# EAGLE board Backplane (EAGLE 6.6.0), part 1 of 2
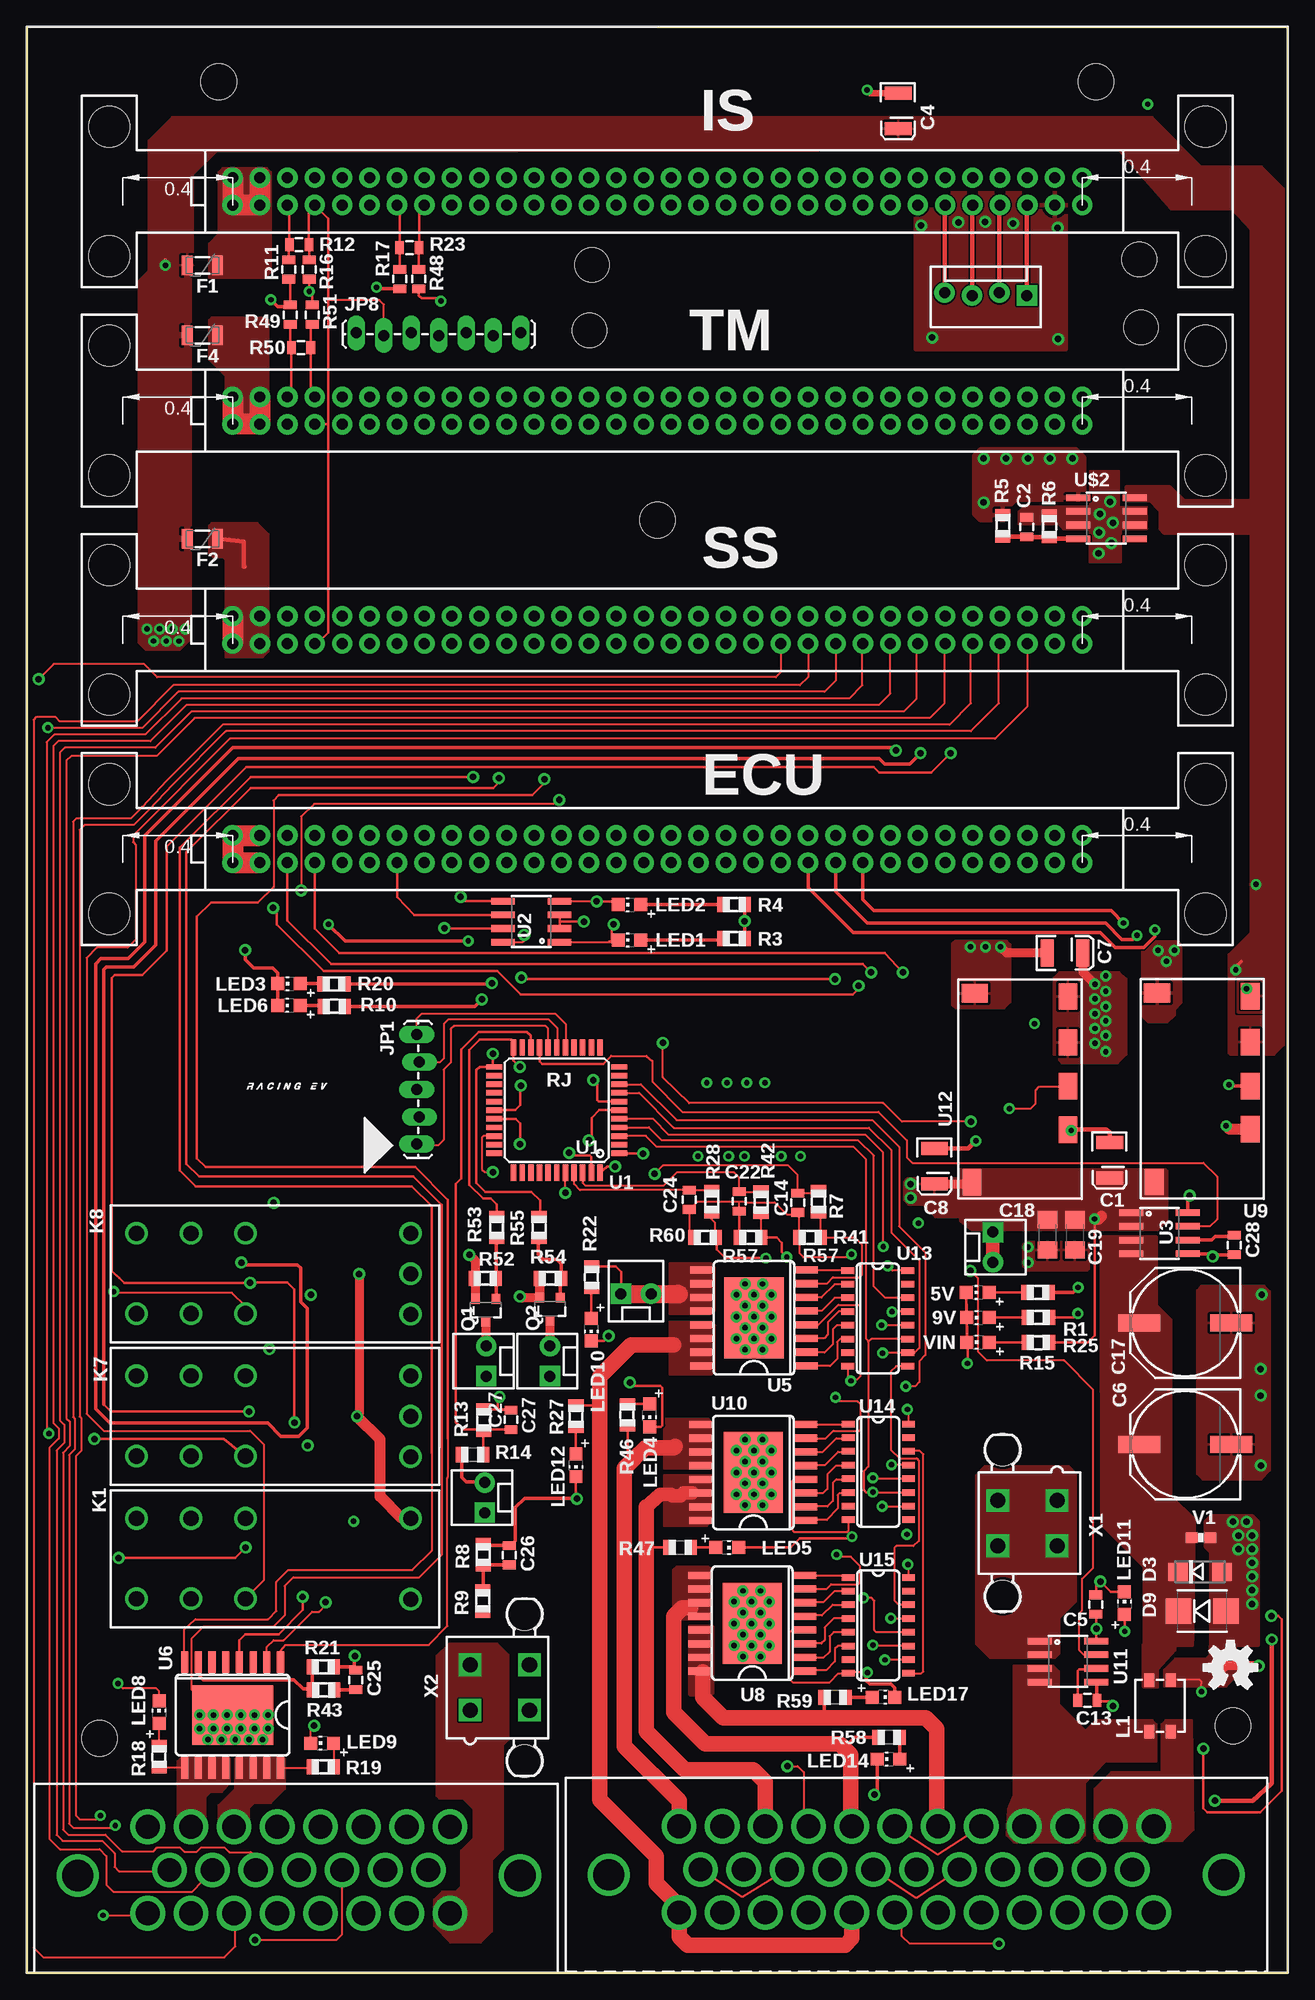
[diagram p0: board, top side]
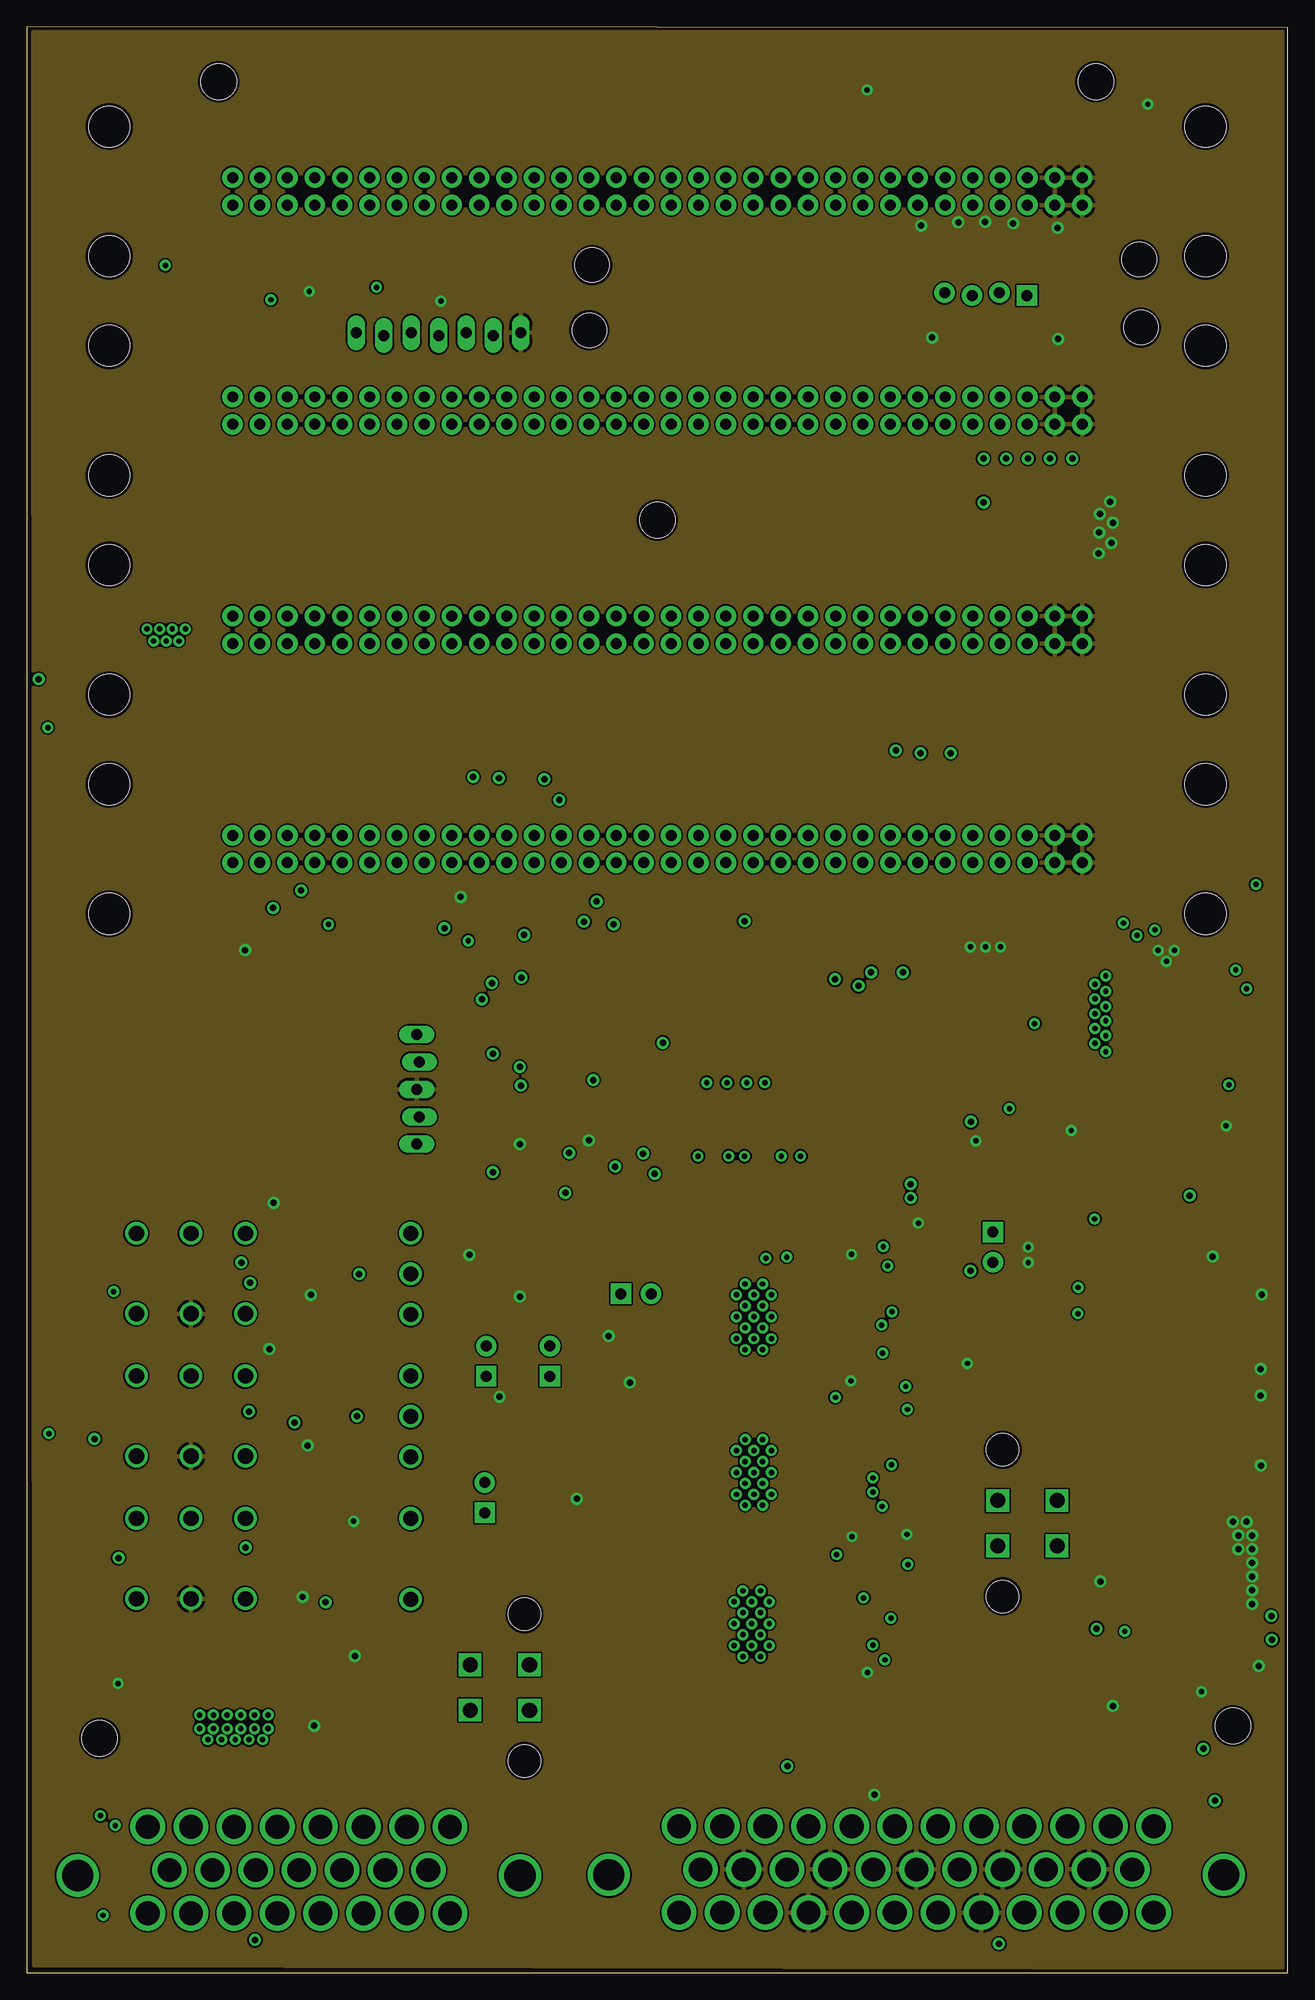
[diagram p1: board, inner layer Route2]
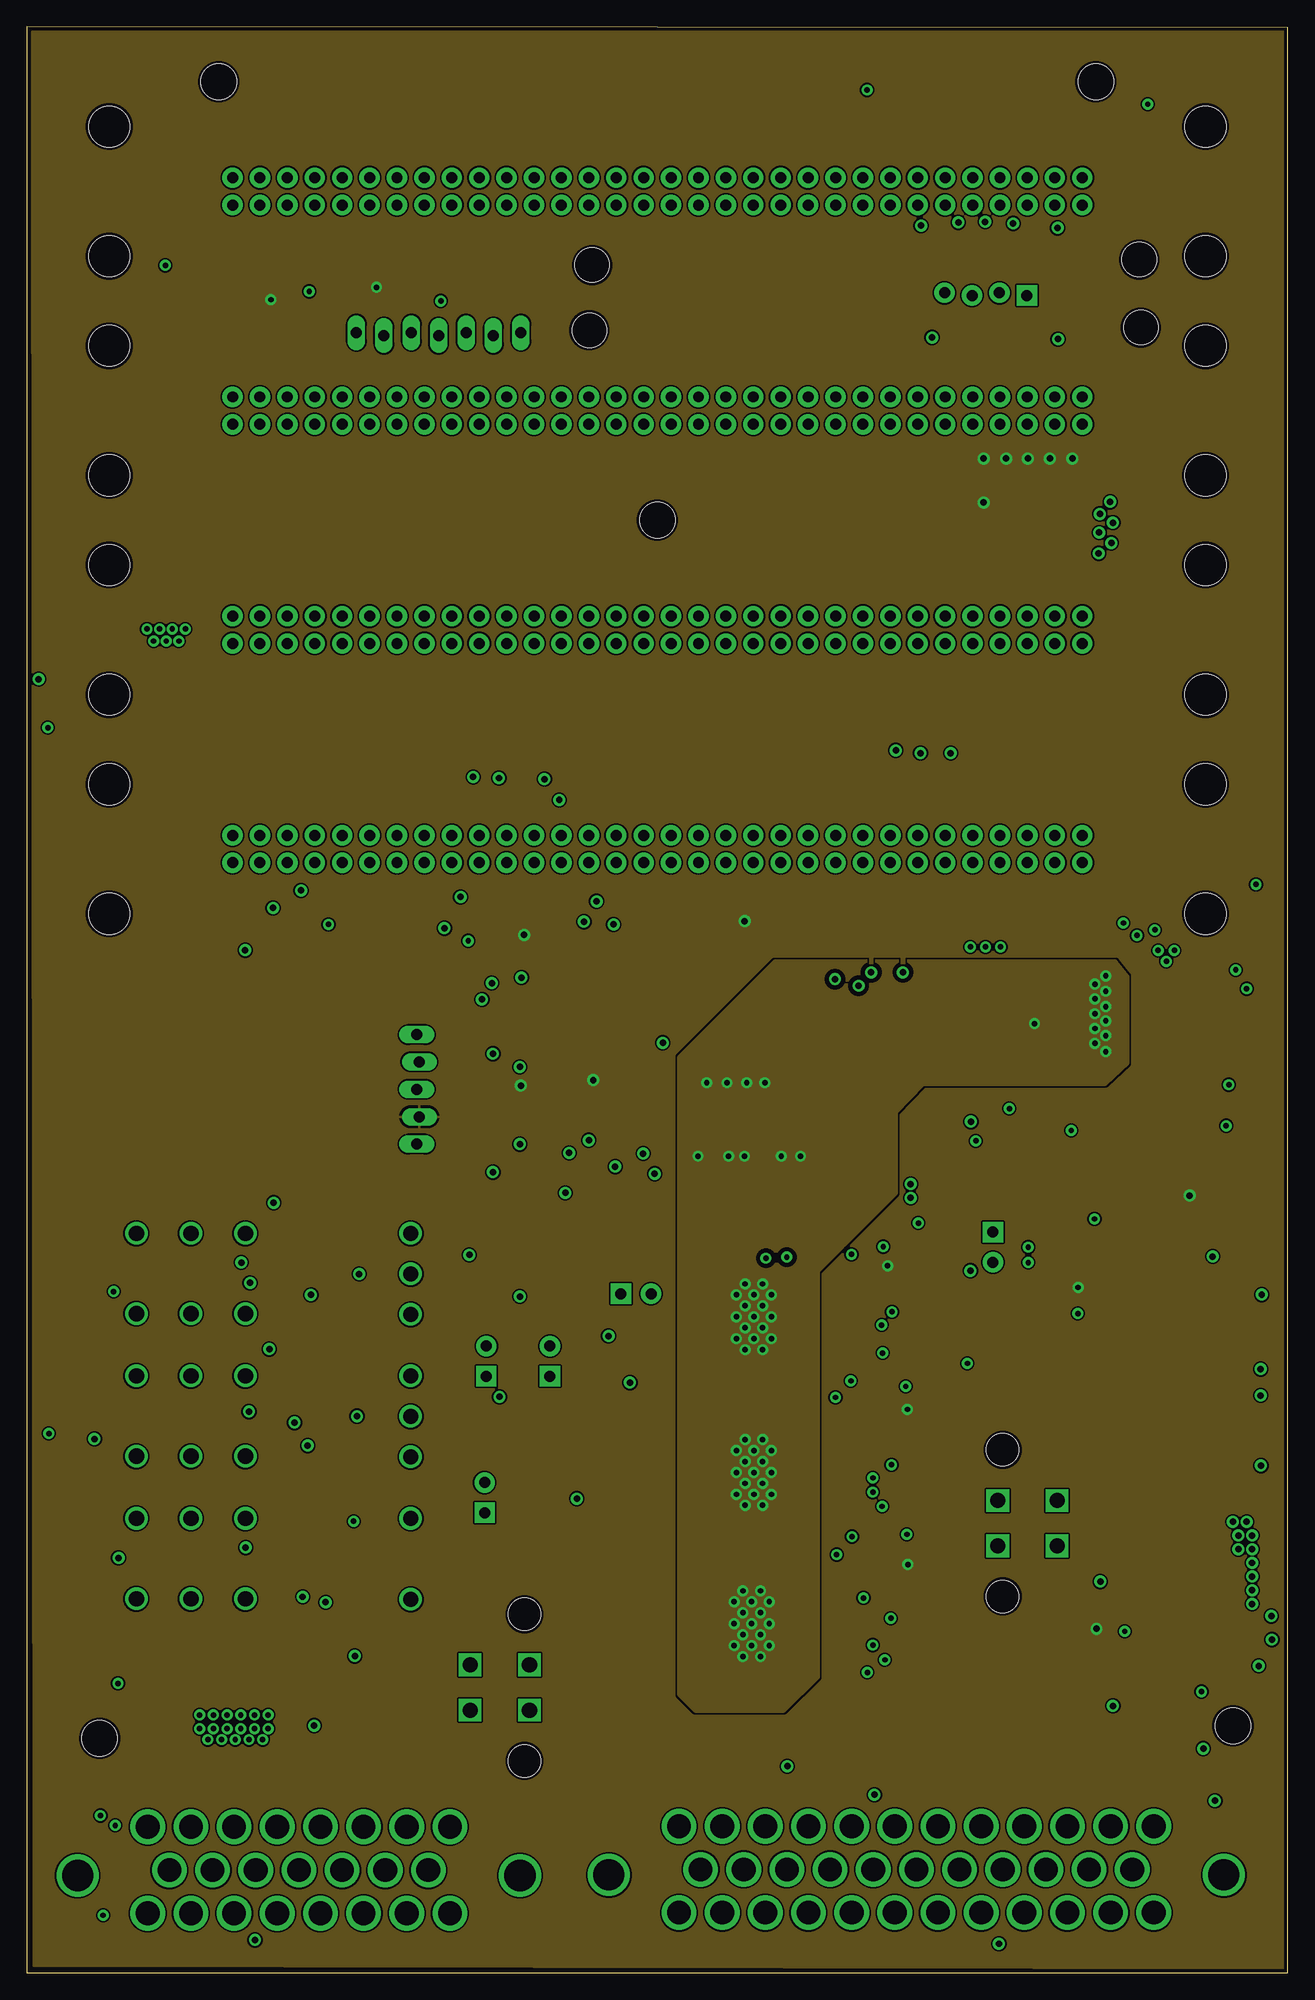
[diagram p2: board, inner layer Route15]
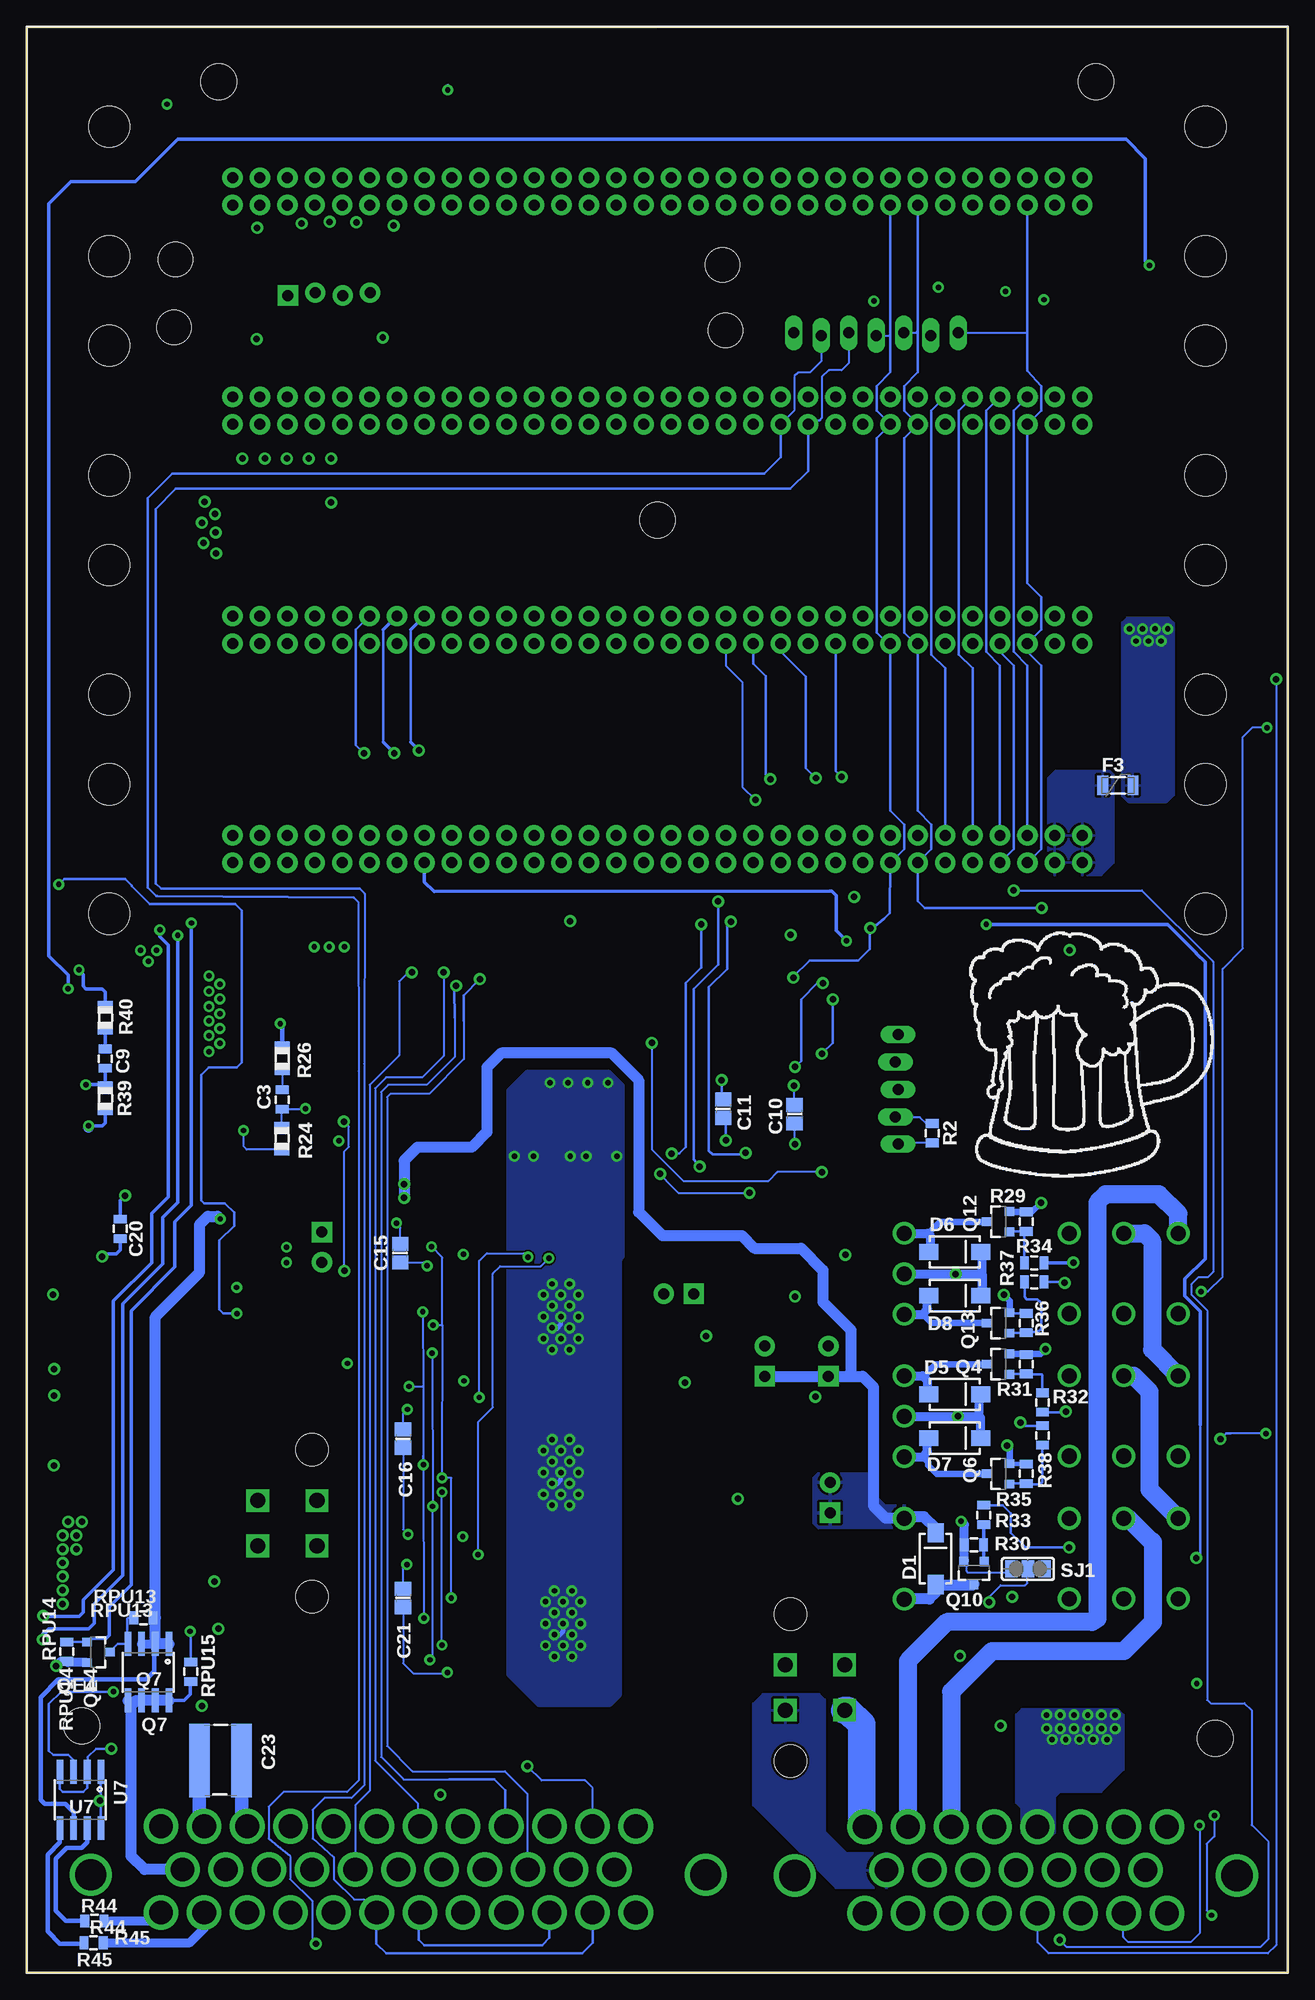
[diagram p3: board, bottom side, seen from below]

Size 116.84 x 180.34 mm. Coordinates in mm from the lower left corner, seen from the top.
Outline: 0,0 116.84,0 116.84,180.29 0,180.34 0,0
Copper layers (1*2*15*16): Top 0.035mm / dielectric 1.5mm / Route2 0.035mm / dielectric 0.15mm / Route15 0.035mm / dielectric 0.2mm / Bottom 0.035mm
Design rules "SparkFun4layer": minimum track width 8mil, minimum drill 20mil, track to track 6mil, track to pad 6mil, pad to pad 6mil, via to via 6mil, smd to smd 6mil, copper to edge 10mil, drill to drill 6mil, minimum pad ring 12mil, minimum via ring 10mil, stop-mask expansion 4mil, vias tented up to drill 25mil, thermal gap 10mil
Net classes: 1 power: width 0.61 mm, drill 0.711 mm, clearance 0.203 mm
Holes 3.2 mm at 52.12,152.22 52.37,158.27 103.07,158.78 103.23,152.48

## Footprints (pad centres in the part's own frame; a part is rotated, then mirrored left to right if it is on the bottom)
CHIP-LED0805 = smd 1.2 x 1.2: A 0,-1.05; C 0,1.05
EIA3528 = smd 1.2 x 2.5: A 1.65,0; C -1.65,0
0805 = smd 0.8 x 1.2: 1 -0.9,0; 2 0.9,0
PANASONIC_G = smd 3.9 x 1.6: + 4.25,0; - -4.25,0
C0805 = smd 1.3 x 1.5: 1 -0.85,0; 2 0.85,0
1206 = smd 1.6 x 1.8: 1 -1.4,0; 2 1.4,0
C1825 = smd 1.9 x 6.8: 1 -1.95,0; 2 1.95,0
SMA-DIODE-KIT = smd 1.77 x 1.47: A -2.4,0; C 2.4,0
DO-214AC = smd 1.8 x 1.7: A 2.05,0; C -2.05,0
SMB-DIODE = smd 2.4 x 2.4: A 2.2,0; C -2.2,0
PTC-1206 = smd 1 x 1.8: 1 -1.4,0; 2 1.4,0
1-770669-1 = drill 2.2: 1 -14,4; 2 -10,4; 3 -6,4; 4 -2,4; 5 2,4; 6 6,4; 7 10,4; 8 14,4; 9 -12,0; 10 -8,0; 11 -4,0; 12 0,0; 13 4,0; 14 8,0; 15 12,0; 16 -14,-4; 17 -10,-4; 18 -6,-4; 19 -2,-4; 20 2,-4; 21 6,-4; 22 10,-4; 23 14,-4 | drill 2.9: 24 -20.5,-0.5; 25 20.5,-0.5
1-776163-2 = drill 2.2: 1 -22,4; 2 -18,4; 3 -14,4; 4 -10,4; 5 -6,4; 6 -2,4; 7 2,4; 8 6,4; 9 10,4; 10 14,4; 11 18,4; 12 22,4; 13 -20,0; 14 -16,0; 15 -12,0; 16 -8,0; 17 -4,0; 18 0,0; 19 4,0; 20 8,0; 21 12,0; 22 16,0; 23 20,0; 24 -22,-4; 25 -18,-4; 26 -14,-4; 27 -10,-4; 28 -6,-4; 29 -2,-4; 30 2,-4; 31 6,-4; 32 10,-4; 33 14,-4; 34 18,-4; 35 22,-4 | drill 2.88: TH1 -28.5,-0.5; TH2 28.5,-0.5
1X05_LOCK_LONGPADS = drill 1.016 long: 1 0,0; 2 2.54,-0.254; 3 5.08,0; 4 7.62,-0.254; 5 10.16,0
MOLEX-1X2_LOCK = drill 1.016 pad 1.88 square: 1 -0.127,0 | drill 1.016 pad 1.88: 2 2.667,0
MOLEX-1X4_LOCK = drill 1.016 pad 1.88 square: 1 0,0.127 | drill 1.016 pad 1.88: 2 2.54,-0.127; 3 5.08,0.127; 4 7.62,-0.127
1X07_LOCK_LONGPADS = drill 1.016 long: 1 0,0.127; 2 2.54,-0.127; 3 5.08,0.127; 4 7.62,-0.127; 5 10.16,0.127; 6 12.7,-0.127; 7 15.24,0.127
RTE44024F = drill 1.4: 11 9.06,-3.75; 12 4.01,-3.75; 14 14.11,-3.75; 21 9.06,3.7; 22 4.01,3.7; 24 14.11,3.7; A1 -11.29,-3.75; A2 -11.29,3.75
RT424F24 = drill 1.4: 11 11.6,-3.75; 12 6.55,-3.75; 14 16.65,-3.75; 21 11.6,3.7; 22 6.55,3.7; 24 16.65,3.7; A1 -8.75,-3.75; A2 -8.75,3.75; A3 -8.75,0
ACM1513-551-2PL-TL = smd 1.25 x 0.95: IN+ -2.4,1; IN- -2.4,-1; OUT+ 2.4,1; OUT- 2.4,-1
SOT23-3 = smd 0.8 x 0.9: 1 -0.95,-1; 2 0.95,-1; 3 0,1.1
SO08 = smd 0.61 x 2.21: 1 -1.905,-2.616; 2 -0.635,-2.616; 3 0.635,-2.616; 4 1.905,-2.616; 5 1.905,2.616; 6 0.635,2.616; 7 -0.635,2.616; 8 -1.905,2.616
SOT-23 = smd 0.8 x 0.9: 1 -0.95,-0.23; 2 0.95,-0.23; 3 0,1.87
R0805 = smd 1.1 x 1.4: 1 -1,0; 2 1,0
PAD-JUMPER-3-NO_YES_SILK_FULL_BOX = smd 1.168 x 1.6: 1 -1.524,0; 2 0,0; 3 1.524,0
STAND-OFF = hole 3.302: 0,0
TQFP-44 = smd 1.5 x 0.5: 1 -5.8,4; 2 -5.8,3.2; 3 -5.8,2.4; 4 -5.8,1.6; 5 -5.8,0.8; 6 -5.8,0; 7 -5.8,-0.8; 8 -5.8,-1.6; 9 -5.8,-2.4; 10 -5.8,-3.2; 11 -5.8,-4; 23 5.8,-4; 24 5.8,-3.2; 25 5.8,-2.4; 26 5.8,-1.6; 27 5.8,-0.8; 28 5.8,0; 29 5.8,0.8; 30 5.8,1.6; 31 5.8,2.4; 32 5.8,3.2; 33 5.8,4 | smd 0.5 x 1.5: 12 -4,-5.8; 13 -3.2,-5.8; 14 -2.4,-5.8; 15 -1.6,-5.8; 16 -0.8,-5.8; 17 0,-5.8; 18 0.8,-5.8; 19 1.6,-5.8; 20 2.4,-5.8; 21 3.2,-5.8; 22 4,-5.8; 34 4,5.8; 35 3.2,5.8; 36 2.4,5.8; 37 1.6,5.8; 38 0.8,5.8; 39 0,5.8; 40 -0.8,5.8; 41 -1.6,5.8; 42 -2.4,5.8; 43 -3.2,5.8; 44 -4,5.8
SO-8 = smd 0.61 x 2.21: 1 -1.905,-2.616; 2 -0.635,-2.616; 3 0.635,-2.616; 4 1.905,-2.616; 5 1.905,2.616; 6 0.635,2.616; 7 -0.635,2.616; 8 -1.905,2.616
SO-16-POWER = smd 2.032 x 0.66: 1 -4.902,4.445; 2 -4.902,3.175; 3 -4.902,1.905; 4 -4.902,0.635; 5 -4.902,-0.635; 6 -4.902,-1.905; 7 -4.902,-3.175; 8 -4.902,-4.445; 9 4.902,-4.445; 10 4.902,-3.175; 11 4.902,-1.905; 12 4.902,-0.635; 13 4.902,0.635; 14 4.902,1.905; 15 4.902,3.175; 16 4.902,4.445 | smd 5.5 x 7.5: EP 0,0
APXW005A0X43-SRZ = smd 1.73 x 2.44: 1 1.28,1.52 | smd 2.44 x 1.73: 2 18.796,1.27; 3 13.92,10.16; 4 9.906,10.16; 5 5.842,10.16; 6 1.574,10.16
SO16 = smd 0.6 x 1.2: 1 -4.445,-2.8; 2 -3.175,-2.8; 3 -1.905,-2.8; 4 -0.635,-2.8; 5 0.635,-2.8; 6 1.905,-2.8; 7 3.175,-2.8; 8 4.445,-2.8; 9 4.445,2.8; 10 3.175,2.8; 11 1.905,2.8; 12 0.635,2.8; 13 -0.635,2.8; 14 -1.905,2.8; 15 -3.175,2.8; 16 -4.445,2.8
CS64 = drill 1.016 pad 1.88: 1 -39.37,-1.27; 2 -36.83,-1.27; 3 -34.29,-1.27; 4 -31.75,-1.27; 5 -29.21,-1.27; 6 -26.67,-1.27; 7 -24.13,-1.27; 8 -21.59,-1.27; 9 -19.05,-1.27; 10 -16.51,-1.27; 11 -13.97,-1.27; 12 -11.43,-1.27; 13 -8.89,-1.27; 14 -6.35,-1.27; 15 -3.81,-1.27; 16 -1.27,-1.27; 17 1.27,-1.27; 18 3.81,-1.27; 19 6.35,-1.27; 20 8.89,-1.27; 21 11.43,-1.27; 22 13.97,-1.27; 23 16.51,-1.27; 24 19.05,-1.27; 25 21.59,-1.27; 26 24.13,-1.27; 27 26.67,-1.27; 28 29.21,-1.27; 29 31.75,-1.27; 30 34.29,-1.27; 31 36.83,-1.27; 32 39.37,-1.27; 33 -39.37,1.27; 34 -36.83,1.27; 35 -34.29,1.27; 36 -31.75,1.27; 37 -29.21,1.27; 38 -26.67,1.27; 39 -24.13,1.27; 40 -21.59,1.27; 41 -19.05,1.27; 42 -16.51,1.27; 43 -13.97,1.27; 44 -11.43,1.27; 45 -8.89,1.27; 46 -6.35,1.27; 47 -3.81,1.27; 48 -1.27,1.27; 49 1.27,1.27; 50 3.81,1.27; 51 6.35,1.27; 52 8.89,1.27; 53 11.43,1.27; 54 13.97,1.27; 55 16.51,1.27; 56 19.05,1.27; 57 21.59,1.27; 58 24.13,1.27; 59 26.67,1.27; 60 29.21,1.27; 61 31.75,1.27; 62 34.29,1.27; 63 36.83,1.27; 64 39.37,1.27 | hole 3.81: -50.8,-6.007; -50.8,6.007; 50.8,6.007; 50.8,-6.007
0603-RES = smd 1.1 x 1: 1 -0.85,0; 2 0.85,0
5566-4 = drill 1.4 square: 1 2.1,-2.75; 2 -2.1,-2.75; 3 2.1,2.75; 4 -2.1,2.75 | hole 3: 6.8,2.29; -6.8,2.29

## Placement (x,y rotation side)
5V  Green  [CHIP-LED0805]  88.11,63.04 90 top
9V  Green  [CHIP-LED0805]  88.14,60.71 90 top
C1  10uF  [EIA3528]  100.33,75.29 270 top
C2  0.1uF  [0805]  92.63,133.99 90 top
C3  DNP  [0805]  93.17,80.92 270 bottom
C4  10uF  [EIA3528]  80.72,172.54 270 top
C5  0.1uF  [0805]  99.03,34.11 90 top
C6  100uF  [PANASONIC_G]  107.34,48.95 180 top
C7  10uF  [EIA3528]  96.19,94.51 0 top
C8  10uF  [EIA3528]  84.1,74.73 270 top
C9  dnp  [0805]  109.58,84.71 270 bottom
C10  .1uF  [C0805]  45.72,79.55 270 bottom
C11  .1uF  [C0805]  52.32,80.06 270 bottom
C13  0.1uF  [0805]  98.27,25.25 0 top
C14  10nF  [0805]  71.42,71.35 270 top
C15  .1uF  [C0805]  82.25,66.67 90 bottom
C16  .1uF  [C0805]  81.99,49.5 270 bottom
C17  100uF  [PANASONIC_G]  107.34,60.22 180 top
C18  1uf  [1206]  94.56,68.38 270 top
C19  1uf  [1206]  97.1,68.38 270 top
C20  0.1uF  [0805]  108.2,68.94 270 bottom
C21  .1uF  [C0805]  81.99,34.72 270 bottom
C22  10nF  [0805]  66.01,71.48 270 top
C23  1000pf  [C1825]  98.91,19.66 180 bottom
C24  10nF  [0805]  61.39,71.63 270 top
C25  10nF  [0805]  30.48,27.13 90 top
C26  1uF  [0805]  44.7,38.68 90 top
C27  1uF  [0805]  44.86,51.23 90 top
C28  .1uF  [0805]  111.86,67.44 270 top
D1  ES1AE-TP  [SMA-DIODE-KIT]  32.64,38.35 90 bottom
D3  TVS  [DO-214AC]  108.71,37.13 0 top
D5  ES1AE-TP  [SMA-DIODE-KIT]  30.86,53.59 0 bottom
D6  ES1AE-TP  [SMA-DIODE-KIT]  30.86,66.8 0 bottom
D7  ES1AE-TP  [SMA-DIODE-KIT]  30.86,49.53 0 bottom
D8  ES1AE-TP  [SMA-DIODE-KIT]  30.86,62.74 0 bottom
D9  30V  [SMB-DIODE]  108.92,33.5 0 top
F1  PTCSMD  [PTC-1206]  16.26,158.24 180 top
F2  PTCSMD  [PTC-1206]  16.26,132.89 180 top
F3  PTCSMD  [PTC-1206]  15.75,110.03 0 bottom
F4  PTCSMD  [PTC-1206]  16.26,151.77 180 top
J1  M23  [1-770669-1]  25.2,9.5 0 top
J2  M35  [1-776163-2]  82.42,9.55 0 top
JP1  [1X05_LOCK_LONGPADS]  36.12,76.78 90 top
JP2  M02POLAR_LOCK  [MOLEX-1X2_LOCK]  55.17,62.92 0 top
JP3  M02POLAR_LOCK  [MOLEX-1X2_LOCK]  42.57,55.4 90 top
JP4  M02POLAR_LOCK  [MOLEX-1X2_LOCK]  48.46,55.4 90 top
JP5  M02POLAR_LOCK  [MOLEX-1X2_LOCK]  42.42,42.75 90 top
JP6  M02POLAR_LOCK  [MOLEX-1X2_LOCK]  89.51,68.5 270 top
JP7  Headphone  [MOLEX-1X4_LOCK]  92.66,155.58 180 top
JP8  [1X07_LOCK_LONGPADS]  30.53,151.87 0 top
K1  RTE44024F  [RTE44024F]  24.26,38.35 180 top
K7  RT424F24  [RT424F24]  26.8,51.56 180 top
K8  RT424F24  [RT424F24]  26.8,64.77 180 top
L1  ACM1513-551-2PL-TL  [ACM1513-551-2PL-TL]  105,24.71 90 top
LED1  green  [CHIP-LED0805]  55.83,95.71 90 top
LED2  red  [CHIP-LED0805]  55.83,98.98 90 top
LED3  red  [CHIP-LED0805]  24.28,91.66 90 top
LED4  green  [CHIP-LED0805]  57.71,51.64 180 top
LED5  green  [CHIP-LED0805]  64.9,39.4 270 top
LED6  green  [CHIP-LED0805]  24.27,89.65 90 top
LED8  green  [CHIP-LED0805]  12.24,24.13 0 top
LED9  green  [CHIP-LED0805]  27.36,21.26 90 top
LED10  green  [CHIP-LED0805]  52.3,59.59 180 top
LED11  [CHIP-LED0805]  101.7,34.24 0 top
LED12  green  [CHIP-LED0805]  50.88,47.02 180 top
LED14  green  [CHIP-LED0805]  79.83,19.79 90 top
LED17  green  [CHIP-LED0805]  79.38,25.53 270 top
Q1  BSS123  [SOT23-3]  42.52,61.44 180 top
Q2  BSS123  [SOT23-3]  48.46,61.54 180 top
Q4  BSS123  [SOT23-3]  26.8,56.39 90 bottom
Q6  BSS123  [SOT23-3]  26.8,46.23 90 bottom
Q7  Si9435BDY  [SO08]  105.59,27.84 180 bottom
Q10  BSS123  [SOT23-3]  29.08,37.08 180 bottom
Q12  BSS123  [SOT23-3]  26.8,69.6 90 bottom
Q13  BSS123  [SOT23-3]  26.8,60.2 90 bottom
QE4  BSS123  [SOT-23]  111.05,29.69 270 bottom
R1  1k  [R0805]  93.7,63.04 0 top
R2  10k  [0805]  32.94,77.8 90 bottom
R3  1k  [R0805]  65.53,95.83 0 top
R4  1k  [R0805]  65.53,98.98 0 top
R5  1k  [R0805]  90.42,134.11 90 top
R6  1k  [R0805]  94.74,134.04 270 top
R7  1k  [R0805]  73.36,71.45 270 top
R8  24k  [R0805]  42.27,38.73 270 top
R9  91k  [R0805]  42.24,34.44 270 top
R10  1k  [R0805]  28.47,89.55 0 top
R11  523  [0805]  24.26,157.86 270 top
R12  120  [0805]  25.22,160.17 180 top
R13  24k  [R0805]  42.32,51.21 270 top
R14  91k  [R0805]  41.3,48.01 180 top
R15  1.21k  [R0805]  93.73,58.42 0 top
R16  523  [0805]  26.16,157.86 90 top
R17  523  [0805]  34.54,156.97 270 top
R18  1k  [R0805]  12.24,20.02 270 top
R19  1k  [R0805]  27.46,19.08 180 top
R20  1k  [R0805]  28.46,91.63 0 top
R21  1k  [R0805]  27.46,28.32 0 top
R22  1k  [R0805]  52.32,64.44 90 top
R23  120  [0805]  35.43,159.89 180 top
R24  8.43k  [R0805]  93.22,77.29 270 bottom
R25  1.21k  [R0805]  93.73,60.71 0 top
R26  dnp  [R0805]  93.17,84.73 270 bottom
R27  1k  [R0805]  50.88,51.56 90 top
R28  1k  [R0805]  63.45,71.45 270 top
R29  10k  [0805]  24.26,69.6 270 bottom
R30  10k  [0805]  29.08,39.62 0 bottom
R31  10k  [0805]  24.26,56.39 270 bottom
R32  1k  [0805]  22.73,52.83 270 bottom
R33  1k  [0805]  28.17,42.42 90 bottom
R34  1k  [0805]  23.49,65.79 0 bottom
R35  10k  [0805]  24.26,46.23 270 bottom
R36  10k  [0805]  24.26,60.2 270 bottom
R37  1k  [0805]  23.49,64.01 180 bottom
R38  1k  [0805]  22.73,49.78 270 bottom
R39  8.43k  [R0805]  109.6,81.03 270 bottom
R40  dnp  [R0805]  109.58,88.49 270 bottom
R41  1k  [R0805]  72.57,68.15 180 top
R42  1k  [R0805]  68.02,71.4 270 top
R43  1k  [R0805]  27.48,26.19 180 top
R44  0  [0805]  110.59,4.78 0 bottom
R45  0  [0805]  110.67,2.77 0 bottom
R46  1k  [R0805]  55.65,51.69 270 top
R47  1k  [R0805]  60.53,39.4 180 top
R48  523  [0805]  36.32,156.97 90 top
R49  523  [0805]  24.38,153.67 90 top
R50  120  [0805]  25.4,150.62 180 top
R51  523  [0805]  26.42,153.67 270 top
R52  100k  [R0805]  42.47,64.34 0 top
R53  1k  [R0805]  43.54,69.06 90 top
R54  100k  [R0805]  48.51,64.34 0 top
R55  1k  [R0805]  47.45,69.06 90 top
R57  1k  [R0805]  67.06,68.15 180 top
R58  1k  [R0805]  79.88,21.82 180 top
R59  1k  [R0805]  74.88,25.53 180 top
R60  1k  [R0805]  62.84,68.12 180 top
RPU13  22k  [0805]  106.05,32.89 0 bottom
RPU14  10k  [0805]  113.16,29.74 90 bottom
RPU15  2.2k  [0805]  101.65,27.88 270 bottom
SJ1  [PAD-JUMPER-3-NO_YES_SILK_FULL_BOX]  24.08,37.41 180 bottom
STANDOFF1  STAND-OFF  [STAND-OFF]  99.06,175.26 0 top
STANDOFF2  STAND-OFF  [STAND-OFF]  58.42,134.62 90 top
STANDOFF3  STAND-OFF  [STAND-OFF]  111.76,22.86 0 top
STANDOFF4  STAND-OFF  [STAND-OFF]  17.78,175.26 0 top
STANDOFF5  STAND-OFF  [STAND-OFF]  6.73,21.72 0 top
U1  PIC18F45K22  [TQFP-44]  49.1,79.93 180 top
U2  SN75HVD08DR  [SO-8]  46.74,97.41 90 top
U3  ACS712  [SO-8]  104.95,68.53 270 top
U5  VND7040AJTR-E  [SO-16-POWER]  67.36,60.68 180 top
U6  VND7040AJTR-E  [SO-16-POWER]  19.05,23.88 270 top
U7  FAN3278TMX  [SO-8]  111.89,16 180 bottom
U8  VND7040AJTR-E  [SO-16-POWER]  67.21,32.39 180 top
U9  APXW005A0X43-SRZ  [APXW005A0X43-SRZ]  103.2,92.07 270 top
U10  VND7040AJTR-E  [SO-16-POWER]  67.31,46.36 180 top
U11  ACS712  [SO-8]  96.47,28.83 270 top
U12  APXW005A0X43-SRZ  [APXW005A0X43-SRZ]  86.31,92.05 270 top
U13  74LS595D  [SO16]  78.84,60.63 270 top
U14  74LS595D  [SO16]  78.89,46.41 270 top
U15  74LS595D  [SO16]  78.89,32.18 270 top
U$1  CARD-SLOT  [CS64]  58.42,104.14 0 top
U$2  LM2931  [SO08]  100.03,134.8 270 top
U$3  BEERL  [B-L]  29.46,73.74 0 bottom
U$4  CARD-SLOT  [CS64]  58.42,144.78 0 top
U$5  CARD-SLOT  [CS64]  58.42,165.1 0 top
U$6  CARD-SLOT  [CS64]  58.42,124.46 0 top
U$7  LOGO  [L-MS]  17.37,81.05 0 top
U$8  OSHW-LOGOM  [OSHW-LOGO-M]  111.53,28.27 0 top
U$9  INDPK1  [PICKIT-PIN-1]  33.83,76.68 90 top
V1  30V  [0603-RES]  108.79,40.31 180 top
VIN  Green  [CHIP-LED0805]  88.14,58.42 90 top
X1  5566-4  [5566-4]  92.71,41.66 90 top
X2  5566-4  [5566-4]  43.82,26.42 270 top

## Library data of the parts
5V 9V C6 C10 C11 C15-C17 C21 C23 LED1-LED6 LED8-LED12 LED14 LED17 R1 R3-R10 R13-R15 R18-R22 R24-R28 R39-R43 R46 R47 R52-R55 R57-R60 VIN = adafruit
C1 C4 C5 C7 C8 C13 C14 C18-C20 C22 C24-C28 R2 R11 R12 R16 R17 R23 R29-R38 R44 R45 R48-R51 SJ1 = SparkFun-Passives
C2 C3 C9 = SparkFun-Capacitors
D1 D5-D8 Q7 = SparkFun-DiscreteSemi
D3 U9 U12 = NASA_LIB
D9 RPU13-RPU15 U$8 V1 = SparkFun
F1-F4 = SparkFun-PowerIC; PROD_ID: RES-11150
J1 J2 K1 K7 K8 L1 U1-U3 U5-U8 U10 U11 U$1 U$4-U$6 U$9 = FSAE Eletric
JP1-JP8 = SparkFun-Connectors
Q1 Q2 Q4 Q6 Q10 Q12 Q13 = SparkFun-DiscreteSemi; PROD_ID: TRANS-08345
QE4 = DFT
STANDOFF1-STANDOFF5 = SparkFun-Electromechanical
U13-U15 = SparkFun-DigitalIC; PROD_ID: IC-07875
U$2 = SparkFun-PowerIC
U$3 U$7 = Pic
X1 X2 = con-molex; OC_FARNELL: unknown; OC_NEWARK: unknown

## Nets
1AVAL: C22.1 R42.1 U1.42
2AVAL: C24.1 R28.1 U1.41
3AVAL: C14.1 R7.1 U1.40
+5V: C5.1 C10.1 C11.1 C15.1 C16.1 C20.1 C21.1 JP1.2 R1.2 R2.2 R3.2 R4.2 R5.2 R11.2 R17.2 R49.2 U1.7 U1.28 U2.8 U3.8 U11.8 U13.16 U14.16 U15.16 U$2.1
+9V: C4.A F1.2 F2.2 F3.2 F4.2 R25.2 R40.1 U9.5 U9.6 U$2.8
+24V: C1.A C8.A C18.1 C19.1 D1.C D5.C D6.C D7.C D8.C JP3.1 JP4.1 JP5.1 JP5.2 JP6.1 JP6.2 K1.A1 K7.A3 K8.A3 Q7.1 Q7.2 Q7.3 R14.2 R15.2 RPU13.2 U3.1 U3.2 U7.6 U9.2 U12.2
AIR-BOT+PRE: J1.3 R19.2 U6.13 U6.14 U6.15 U6.16
AIR-P: J1.8 X2.1
AIR-TOP: J1.2 R18.2 U6.9 U6.10 U6.11 U6.12
AMD-SEN: J1.17 U$6.28
B-LIGHT: J2.23 Q7.5 Q7.6 Q7.7 Q7.8 RPU15.2
B-LIGHT-C: QE4.1 RPU14.2 U$1.24
BMS-P: J2.1 R46.2 U10.9 U10.10 U10.11 U10.12
BOTS-SEN: J1.16 U$6.29
BPD-R-SET: R34.2 U$6.57
BPD-SEN: K8.22 U$6.23
BRAKE_PRESURE: U$6.5
CLEAR: U1.8 U13.10 U14.10 U15.10
CLK: U1.3 U13.11 U14.11 U15.11
CSENSE: U1.19 U3.7
CURRENT_SENSOR: U$6.6
DATA-IN: U1.4 U13.14
DDS-P: J2.7 R59.2 U8.13 U8.14 U8.15 U8.16
ECU-RELAY: R33.2 U$1.25
ECU-SEN: K1.22 U$6.30
ECU-SS-SEN: U$1.21
FAN: J1.15 X2.3
FROM-TSMS: J1.4 U6.EP U$6.12
GND: 5V.C 9V.C C1.C C2.2 C4.C C5.2 C6.- C7.C C8.C C10.2 C11.2 C13.2 C14.2 C15.2 C16.2 C17.- C18.2 C19.2 C20.2 C21.2 C22.2 C24.2 C25.2 C26.2 C27.2 C28.2 D3.A D9.A J2.14 J2.16 J2.18 J2.20 J2.22 J2.27 J2.31 JP1.3 JP8.7 K1.21 K7.21 K8.21 L1.OUT- LED3.C LED4.C LED5.C LED6.C LED8.C LED9.C LED10.C LED11.C LED12.C LED14.C LED17.C Q1.2 Q2.2 Q4.2 Q6.2 Q10.2 Q12.2 Q13.2 QE4.2 R6.1 R8.1 R13.1 R16.1 R21.2 R24.2 R29.1 R30.1 R31.1 R35.1 R36.1 R39.2 R41.2 R48.1 R51.1 R52.1 R54.1 R57.2 R60.2 RPU14.1 SJ1.3 U1.6 U1.29 U2.5 U3.5 U5.4 U6.4 U7.3 U8.4 U9.1 U9.3 U10.4 U11.5 U12.1 U12.3 U13.8 U14.8 U15.8 U$1.31 U$1.32 U$1.63 U$1.64 U$2.2 U$2.3 U$2.6 U$2.7 U$4.31 U$4.32 U$4.63 U$4.64 U$5.31 U$5.32 U$5.63 U$5.64 U$6.31 U$6.32 U$6.63 U$6.64 V1.1 VIN.C
H-EN: U7.1 U7.8 U$1.23
H-SIG: U7.2 U7.4 U$1.22
HCMESURE: U1.31 U11.7
HORN+: J2.35 R44.2
HORN-: J2.34 R45.2
IMD-INPUT: J1.13 U$6.14
IMD-R-SET: R32.2 U$6.58
IMD-SEN: K7.22 U$6.24
IS-SEN: J1.18 U$6.22
LAT: U1.5 U13.12 U14.12 U15.12
LED1: R20.2 R53.2 U1.22
LED2: R10.2 R55.2 U1.23
LED-A: U$1.12
LED-B: U$1.13
LOOP-IN: J1.6 K1.11
MAIN: U6.8 U$6.10
MCS-P: J2.3 R47.2 U10.13 U10.14 U10.15 U10.16
N$2: LED8.A R18.1
N$3: C2.1 R5.1 R6.2 U$2.4
N$4: U10.8 U14.1
N$5: F1.1 U$5.1 U$5.2 U$5.33 U$5.34
N$6: Q4.1 R31.2 R32.1
N$7: K1.14 K7.11
N$8: 9V.A R25.1
N$9: F2.1 U$6.1 U$6.2 U$6.33 U$6.34
N$10: LED9.A R19.1
N$11: R21.1 R43.2 U6.7
N$12: F3.1 U$1.1 U$1.2 U$1.33 U$1.34
N$13: F4.1 U$4.1 U$4.2 U$4.33 U$4.34
N$14: SJ1.2 U6.2
N$15: K7.14 K8.11
N$16: LED3.A R20.1
N$17: JP2.1 JP2.2 R22.2 U5.9 U5.10 U5.11 U5.12
N$18: C28.1 U3.6
N$19: 5V.A R1.1
N$20: JP7.1 U$5.30
N$21: JP3.2 Q1.3
N$22: JP4.2 Q2.3
N$23: Q6.1 R35.2 R38.2
N$24: LED1.A R3.1
N$25: LED2.A R4.1
N$26: Q1.1 R52.2 R53.1
N$27: Q2.1 R54.2 R55.1
N$28: LED10.A R22.1
N$29: LED12.A R27.1
N$30: C6.+ C17.+ D3.C D9.C L1.OUT+ U3.3 U3.4 V1.2
N$31: R7.2 R41.1 U5.7
N$32: Q7.4 QE4.3 RPU13.1
N$33: U10.6 U14.2
N$34: LED11.A RPU15.1
N$35: C3.1 R26.2
N$36: U10.5 U14.3
N$37: C3.2 R24.1 U12.4
N$38: JP7.2 U$5.29
N$39: U10.3 U14.4
N$40: JP1.4 U1.17
N$41: U$1.38 U$4.38
N$42: R15.1 VIN.A
N$43: JP1.5 U1.16
N$44: U10.2 U14.5
N$45: D1.A K1.A2 Q10.3
N$46: JP1.1 R2.1 U1.18
N$47: D5.A K7.A1 Q4.3
N$48: Q10.1 R30.2 R33.1
N$49: D7.A K7.A2 Q6.3
N$50: D6.A K8.A1 Q12.3
N$51: D8.A K8.A2 Q13.3
N$52: R44.1 U7.7
N$53: R45.1 U7.5
N$54: LED6.A R10.1
N$55: Q13.1 R36.2 R37.2
N$56: JP7.3 U$5.28
N$57: U$1.37 U$4.37
N$58: Q12.1 R29.2 R34.1
N$59: C9.1 R40.2
N$60: C9.2 R39.1 U9.4
N$61: U11.1 U11.2 X1.1 X1.2 X1.3 X1.4
N$62: U10.1 U14.6
N$63: C13.1 U11.6
N$64: U8.8 U15.1
N$65: U8.6 U15.2
N$66: U8.5 U15.3
N$67: LED4.A R46.1
N$68: LED5.A R47.1
N$69: R42.2 R57.1 U10.7
N$70: U8.3 U15.4
N$71: U8.2 U15.5
N$72: U8.1 U15.6
N$73: U5.8 U13.1
N$74: U5.6 U13.2
N$75: U5.5 U13.3
N$76: U5.3 U13.4
N$77: U5.2 U13.5
N$78: U5.1 U13.6
N$79: U13.9 U15.14
N$80: U14.14 U15.9
N$81: JP7.4 U$5.27
N$83: LED14.A R58.1
N$84: LED17.A R59.1
N$85: R28.2 R60.1 U8.7
OUTEN: U1.9 U13.13 U14.13 U15.13
P+F: J1.23 X2.2
PEN: U1.21
PRE+: U6.1 U$6.13
RAVAL: C25.1 R43.1
RELAY-SET: R37.1 R38.1 U$6.59
RELAYFAULTCLEAR: SJ1.1
RS1-A: J2.6 J2.8 JP8.1 R11.1 R12.2 U$1.3 U$4.3 U$5.3 U$6.3
RS1-B: J2.17 J2.19 JP8.2 R12.1 R16.2 U$1.4 U$4.4 U$5.4 U$6.4
RS2-A: J2.2 J2.4 JP8.3 R17.1 R23.2 U2.6 U$1.7 U$4.7 U$5.7 U$6.7
RS2-B: J2.13 J2.15 JP8.4 R23.1 R48.2 U2.7 U$1.8 U$4.8 U$5.8 U$6.8
RS3-A: R49.1 R50.2 U$1.35 U$4.35
RS3-B: R50.1 R51.2 U$1.36 U$4.36
RX: LED1.C U1.1 U2.1
SAS-P: J2.5 R58.2 U8.9 U8.10 U8.11 U8.12
SSW_C_SEN: J1.10 U$6.25
SSW_L-SEN: J1.11 U$6.27
SSW_R-SEN: J1.9 U$6.26
TO-TSMS: J1.7 K8.14
TSA: J2.25 J2.30 JP8.5 U$4.11
TSB: J2.26 J2.29 JP8.6 U$4.12
TSMS-SEN: J1.19 U$6.21
TSS-P: J2.24 J2.28 R27.2 U5.13 U5.14 U5.15 U5.16
TX: LED2.C U1.44 U2.4
U2-CNT: U1.43 U2.2 U2.3
VCCIO: C7.A R26.1 U5.EP U8.EP U10.EP U12.5 U12.6
VGND: C23.2 J2.11 J2.12 L1.IN-
VIN: C23.1 J2.9 J2.10 L1.IN+ U11.3 U11.4
VS: R9.2
VSENSE: C27.1 R13.2 R14.1 U1.20
VSENSE2: C26.1 R8.2 R9.1